# EAGLE board CT_schematic (EAGLE 7.6.0)

Size 100 x 80 mm. Coordinates in mm from the lower left corner, seen from the top.
Outline: 0,0 100,0 100,80 0,80 0,0
Copper layers (1*16): Top 0.035mm / dielectric 1.5mm / Bottom 0.035mm
Design rules "default": minimum track width 10mil, minimum drill 24mil, track to track 8mil, track to pad 8mil, pad to pad 8mil, via to via 8mil, smd to smd 8mil, copper to edge 40mil, drill to drill 8mil, minimum pad ring 10mil, minimum via ring 8mil, stop-mask expansion 4mil, vias tented up to drill 0mil, thermal gap 10mil

## Footprints (pad centres in the part's own frame; a part is rotated, then mirrored left to right if it is on the bottom)
C0603 = smd 0.8 x 0.8: 1 -0.762,0; 2 0.762,0
C0402 = smd 0.5 x 0.5: 1 -0.508,0; 2 0.508,0
C1206 = smd 1.3 x 1.6: 1 -1.524,0; 2 1.524,0
C0805 = smd 1.2 x 1.3: 1 -1.016,0; 2 1.016,0
C1210 = smd 1.2 x 2.5: 1 -1.524,0; 2 1.524,0
EXV-9H = smd 3.505 x 1.676: 1 -2.857,0; 2 2.857,0
L0603 = smd 0.8 x 0.8: 1 -0.762,0; 2 0.762,0
PJ-037B_PACKAGE = drill 3.7 square: 1 12,0 | drill 3.2 square: 2 6,0
R0603 = smd 0.8 x 0.8: 1 -0.762,0; 2 0.762,0
WLCSP49 = smd 0.25 x 0.25: A1 -1.2,1.2; A2 -0.8,1.2; A3 -0.4,1.2; A4 0,1.2; A5 0.4,1.2; A6 0.8,1.2; A7 1.2,1.2; B1 -1.2,0.8; B2 -0.8,0.8; B3 -0.4,0.8; B4 0,0.8; B5 0.4,0.8; B6 0.8,0.8; B7 1.2,0.8; C1 -1.2,0.4; C2 -0.8,0.4; C3 -0.4,0.4; C4 0,0.4; C5 0.4,0.4; C6 0.8,0.4; C7 1.2,0.4; D1 -1.2,0; D2 -0.8,0; D3 -0.4,0; D4 0,0; D5 0.4,0; D6 0.8,0; D7 1.2,0; E1 -1.2,-0.4; E2 -0.8,-0.4; E3 -0.4,-0.4; E4 0,-0.4; E5 0.4,-0.4; E6 0.8,-0.4; E7 1.2,-0.4; F1 -1.2,-0.8; F2 -0.8,-0.8; F3 -0.4,-0.8; F4 0,-0.8; F5 0.4,-0.8; F6 0.8,-0.8; F7 1.2,-0.8; G1 -1.2,-1.2; G2 -0.8,-1.2; G3 -0.4,-1.2; G4 0,-1.2; G5 0.4,-1.2; G6 0.8,-1.2; G7 1.2,-1.2
QFN-32 = smd 0.6 x 0.3: 1 -2.3,1.75; 2 -2.3,1.25; 3 -2.3,0.75; 4 -2.3,0.25; 5 -2.3,-0.25; 6 -2.3,-0.75; 7 -2.3,-1.25; 8 -2.3,-1.75; 17 2.3,-1.75; 18 2.3,-1.25; 19 2.3,-0.75; 20 2.3,-0.25; 21 2.3,0.25; 22 2.3,0.75; 23 2.3,1.25; 24 2.3,1.75 | smd 0.3 x 0.6: 9 -1.75,-2.3; 10 -1.25,-2.3; 11 -0.75,-2.3; 12 -0.25,-2.3; 13 0.25,-2.3; 14 0.75,-2.3; 15 1.25,-2.3; 16 1.75,-2.3; 25 1.75,2.3; 26 1.25,2.3; 27 0.75,2.3; 28 0.25,2.3; 29 -0.25,2.3; 30 -0.75,2.3; 31 -1.25,2.3; 32 -1.75,2.3 | smd 3.2 x 3.2: EXP 0,0
SJ-43515TS-SMT-TR = smd 2.2 x 3: 1 0.6,-7.4; 4 3.4,-7.4 | smd 3 x 3: 2 12.8,-7.4; 5 17,-3 | smd 2 x 3: 3 5.3,0; 6 2.5,0 | drill 1.8: P$7 4.5,-3.69; P$8 11.54,-3.69
WM-64PC = drill 0.6 pad 1: 1 -1,0.95; 2 -1,-0.95
ASEK = smd 1.4 x 1: 1 -1.1,-0.8; 2 1.1,-0.8; 3 1.1,0.8; 4 -1.1,0.8
ASFL1 = smd 1.7 x 1.5: 1 -1.27,-1.1; 2 1.27,-1.1; 3 1.27,1.1; 4 -1.27,1.1
WSON-8 = smd 0.3 x 0.6: 1 -0.75,0; 2 0.05,0; 3 0.85,0; 4 1.65,0; 5 1.65,3.8; 6 0.85,3.8; 7 0.05,3.8; 8 -0.75,3.8 | smd 3 x 2.6: PAD 0.45,1.9
SON-6 = smd 0.55 x 0.3: 1 -0.355,0.5 | smd 0.52 x 0.3: 2 -0.37,0; 3 -0.37,-0.5; 4 0.37,-0.5; 5 0.37,0; 6 0.37,0.5
SW_4-1437565-2 = smd 1.4 x 2.1: 1 -2.23,4.55; 2 -2.23,-4.55; 3 2.23,4.55; 4 2.23,-4.55
LGM67K-G1J2-24-Z = smd 0.8 x 1.4: A -2,0; C 0,0
NC7SZ125M5X = smd 1.3 x 0.7: 1 -1.3,0.95; 2 -1.3,0; 3 -1.3,-0.95; 4 1.3,-0.95; 5 1.3,0.95
DUMMY_PACKAGE_137 = drill 0.3: 1 0,-1; 2 1.5,-1; 3 3,-1

## Placement (x,y rotation side)
C1  1e-07  [C0603]  -38.1,67.31 0 top  (outside the outline)
C2  1e-07  [C0603]  -41.91,67.31 0 top  (outside the outline)
C3  1e-07  [C0603]  -45.72,67.31 0 top  (outside the outline)
C4  1e-07  [C0603]  -49.53,67.31 0 top  (outside the outline)
C5  4.7e-06  [C0603]  -34.29,67.31 0 top  (outside the outline)
C6  1e-08  [C0603]  -53.34,67.31 0 top  (outside the outline)
C7  1e-06  [C0603]  -57.15,67.31 0 top  (outside the outline)
C8  1e-07  [C0603]  -60.96,67.31 0 top  (outside the outline)
C9  1e-06  [C0603]  -64.77,67.31 0 top  (outside the outline)
C10  1e-06  [C0603]  -68.58,67.31 0 top  (outside the outline)
C11  1e-06  [C0603]  -72.39,67.31 0 top  (outside the outline)
C12  1e-06  [C0603]  -15.24,72.39 0 top  (outside the outline)
C13  1e-06  [C0603]  -19.05,72.39 0 top  (outside the outline)
C14  1e-06  [C0603]  -22.86,72.39 0 top  (outside the outline)
C15  1e-06  [C0603]  -26.67,72.39 0 top  (outside the outline)
C16  1e-07  [C0402]  -76.2,72.39 0 top  (outside the outline)
C17  1e-07  [C0402]  -15.24,77.47 0 top  (outside the outline)
C18  1e-07  [C0402]  -19.05,77.47 0 top  (outside the outline)
C19  1e-07  [C0402]  -22.86,77.47 0 top  (outside the outline)
C20  1e-06  [C0603]  -30.48,72.39 0 top  (outside the outline)
C21  1e-08  [C0402]  -26.67,77.47 0 top  (outside the outline)
C22  1e-08  [C0402]  -30.48,77.47 0 top  (outside the outline)
C23  1e-08  [C0402]  -34.29,77.47 0 top  (outside the outline)
C24  1e-08  [C0402]  -38.1,77.47 0 top  (outside the outline)
C25  1e-05  [C1206]  -35.56,59.69 0 top  (outside the outline)
C26  1e-05  [C0805]  -53.34,59.69 0 top  (outside the outline)
C27  1e-08  [C0402]  -41.91,77.47 0 top  (outside the outline)
C28  1e-05  [C1206]  -41.91,59.69 0 top  (outside the outline)
C29  1e-05  [C1210]  -29.21,60.96 0 top  (outside the outline)
C30  1e-07  [C0402]  -45.72,77.47 0 top  (outside the outline)
C31  0.0001  [EXV-9H]  -38.1,53.34 0 top  (outside the outline)
C32  0.0001  [EXV-9H]  -49.53,53.34 0 top  (outside the outline)
C33  1e-08  [C0402]  -49.53,77.47 0 top  (outside the outline)
F1  240.0  [L0603]  -34.29,72.39 0 top  (outside the outline)
J1  PJ-037B  [PJ-037B_PACKAGE]  -55.88,21.59 0 top  (outside the outline)
R1  10000.0  [R0603]  -15.24,67.31 0 top  (outside the outline)
R2  1000.0  [R0603]  -38.1,72.39 0 top  (outside the outline)
R3  1600.5  [R0603]  -41.91,72.39 0 top  (outside the outline)
R4  4700.0  [R0603]  -45.72,72.39 0 top  (outside the outline)
R5  10000.0  [R0603]  -20.32,67.31 0 top  (outside the outline)
R6  1270.0  [R0603]  -49.53,72.39 0 top  (outside the outline)
R7  1270.0  [R0603]  -53.34,72.39 0 top  (outside the outline)
R8  100000.0  [R0603]  -58.42,59.69 0 top  (outside the outline)
R9  200.0  [R0603]  -57.15,72.39 0 top  (outside the outline)
R10  1000.0  [R0603]  -60.96,72.39 0 top  (outside the outline)
R11  100000.0  [R0603]  -63.5,59.69 0 top  (outside the outline)
R12  2231.0  [R0603]  -64.77,72.39 0 top  (outside the outline)
R13  1000.0  [R0603]  -68.58,72.39 0 top  (outside the outline)
R14  10000.0  [R0603]  -25.4,67.31 0 top  (outside the outline)
R15  10000.0  [R0603]  -30.48,67.31 0 top  (outside the outline)
R16  9100.0  [R0603]  -72.39,72.39 0 top  (outside the outline)
R17  680000.0  [R0603]  -68.58,59.69 0 top  (outside the outline)
R18  120000.0  [R0603]  -73.66,59.69 0 top  (outside the outline)
U1  STM32L072CZY6  [WLCSP49]  -67.31,53.34 0 top  (outside the outline)
U2  SGTL5000XNAA3  [QFN-32]  -34.29,34.29 0 top  (outside the outline)
U3  SJ-43515TS-SMT-TR  [SJ-43515TS-SMT-TR]  -39.37,10.16 0 top  (outside the outline)
U4  SJ-43515TS-SMT-TR  [SJ-43515TS-SMT-TR]  -67.31,10.16 0 top  (outside the outline)
U5  SJ-43515TS-SMT-TR  [SJ-43515TS-SMT-TR]  -39.37,24.13 0 top  (outside the outline)
U6  WM-64PCT  [WM-64PC]  -20.32,34.29 0 top  (outside the outline)
U7  ASEK-32.768KHz-ECST  [ASEK]  -29.21,53.34 0 top  (outside the outline)
U8  ASFL-24.57MHZ-NCS  [ASFL1]  -48.26,44.45 0 top  (outside the outline)
U9  ASFL1-25MHZ-NCS  [ASFL1]  -64.77,44.45 0 top  (outside the outline)
U10  LP3878SDX-ADJ/NOPB  [WSON-8]  -55.88,31.75 0 top  (outside the outline)
U11  LP3878SDX-ADJ/NOPB  [WSON-8]  -30.48,41.91 0 top  (outside the outline)
U12  TPS3895ADRYR  [SON-6]  -58.42,76.2 0 top  (outside the outline)
U13  4-1437565-2  [SW_4-1437565-2]  -72.39,21.59 0 top  (outside the outline)
U14  Q65110A2395  [LGM67K-G1J2-24-Z]  -17.78,60.96 0 top  (outside the outline)
U15  nc7sz125m5x  [NC7SZ125M5X]  -46.99,59.69 0 top  (outside the outline)
U16  Dummy  [DUMMY_PACKAGE_137]  -55.88,77.47 0 top  (outside the outline)

## Library data of the parts
C1-C33 F1 J1 R1-R18 U1-U16 = circuit_tree

## Nets
CLK_U1_C6: U1.C6 U7.3
CLK_U1_D6: U1.D6 U9.3
CLK_U2_21: U2.21 U8.3
GND: C1.2 C2.2 C3.2 C4.2 C5.2 C6.2 C7.2 C8.2 C16.2 C17.2 C18.2 C19.2 C20.2 C21.2 C22.2 C23.2 C24.2 C25.2 C26.2 C27.2 C28.2 C29.2 C30.2 C31.2 C32.2 C33.2 J1.2 R2.2 R5.2 R7.2 R10.2 R13.2 R16.2 R18.2 U1.D4 U2.1 U2.3 U2.7 U2.EXP U4.1 U5.1 U6.2 U7.2 U8.2 U9.2 U10.3 U10.PAD U11.3 U11.PAD U12.2 U14.C U15.1 U15.3 U16.1
NET_U1_A5: R5.1 U1.A5
NET_U1_D5: R4.1 U1.D5 U15.4
NET_U1_F7: C6.1 C7.1 F1.1 U1.E6 U1.F7
NET_U1_G6: R3.1 U1.G6 U14.A
NET_U1_G7: R1.1 U1.G7 U13.3 U13.4
NET_U2_10: C19.1 U2.10
NET_U2_29: R6.1 U2.29
NET_U2_31: R7.1 U2.31
NET_U3_1: U2.4 U3.1
NET_U3_2: U2.2 U3.2
NET_U3_5: U2.6 U3.5
NET_U4_2: C10.1 U4.2
NET_U4_5: C9.1 U4.5
NET_U4_11: C10.2
NET_U4_12: C9.2
NET_U5_2: C12.1 C13.1 U5.2
NET_U5_5: C11.1 U5.5
NET_U5_13: C12.2 C13.2
NET_U5_14: C11.2
NET_U6_1: C14.1 C15.1 C20.1 U2.16 U6.1
NET_U6_15: C14.2 C15.2
NET_U10_1: C24.1 U10.1
NET_U10_6: R9.2 R10.1 U10.6
NET_U10_8: R8.1 U10.8
NET_U11_1: C27.1 U11.1
NET_U11_6: R12.2 R13.1 U11.6
NET_U11_8: R11.1 U11.8
NET_U12_1: R15.1 R16.1 U12.1
NET_U12_3: R17.2 R18.1 U12.3
NET_U12_4: R14.1 U12.4 U15.2
NET_U13_1: R2.1 U13.1 U13.2
PROC_I2S2_CK: U1.F2 U2.24
PROC_I2S2_SD: U1.E1 U2.26
PROC_I2S2_WS: U1.A6 U2.23
PROC_PA15: U1.A2 U16.2
PROC_PB3: U1.A3 U16.3
VCC_S1_9V1: C25.1 C28.1 C31.1 C32.1 J1.1 R8.2 R11.2 U10.4 U11.4
VCC_TIER1_1V2: C16.1 C26.1 R9.1 U2.30 U10.5
VCC_TIER1_3V3: C1.1 C2.1 C3.1 C4.1 C5.1 C8.1 C17.1 C18.1 C21.1 C22.1 C23.1 C29.1 C30.1 C33.1 F1.2 R1.2 R3.2 R4.2 R6.2 R12.1 R14.2 R15.2 R17.1 U1.A1 U1.A7 U1.B6 U1.G2 U2.5 U2.20 U7.4 U8.4 U9.4 U11.5 U12.6 U15.5

## Tracks (layer width: path | path; a pad name or v marks a point on that pad's centre or on a via)
CLK_U1_C6  (1 unrouted)
CLK_U1_D6  (1 unrouted)
CLK_U2_21  (1 unrouted)
GND  (53 unrouted)
NET_U1_A5  (1 unrouted)
NET_U1_D5  (2 unrouted)
NET_U1_F7  (4 unrouted)
NET_U1_G6  (2 unrouted)
NET_U1_G7  (3 unrouted)
NET_U2_10  (1 unrouted)
NET_U2_29  (1 unrouted)
NET_U2_31  (1 unrouted)
NET_U3_1  (1 unrouted)
NET_U3_2  (1 unrouted)
NET_U3_5  (1 unrouted)
NET_U4_2  (1 unrouted)
NET_U4_5  (1 unrouted)
NET_U5_2  (2 unrouted)
NET_U5_5  (1 unrouted)
NET_U5_13  (1 unrouted)
NET_U6_1  (4 unrouted)
NET_U6_15  (1 unrouted)
NET_U10_1  (1 unrouted)
NET_U10_6  (2 unrouted)
NET_U10_8  (1 unrouted)
NET_U11_1  (1 unrouted)
NET_U11_6  (2 unrouted)
NET_U11_8  (1 unrouted)
NET_U12_1  (2 unrouted)
NET_U12_3  (2 unrouted)
NET_U12_4  (2 unrouted)
NET_U13_1  (2 unrouted)
PROC_I2S2_CK  (1 unrouted)
PROC_I2S2_SD  (1 unrouted)
PROC_I2S2_WS  (1 unrouted)
PROC_PA15  (1 unrouted)
PROC_PB3  (1 unrouted)
VCC_S1_9V1  (8 unrouted)
VCC_TIER1_1V2  (4 unrouted)
VCC_TIER1_3V3  (34 unrouted)